# Altium PCB HLK_RM60_KIT_V1.1.PcbDoc (part 1 of 2)
Units mm, origin at the board's own origin, x right, y up, seen from the top; angles counter-clockwise.
Board outline 140 x 100 mm, 2 copper layers (Top, Bottom), stack 0.29 mm thick; 133 components, 198 nets, 607 pads, 989 vias.
Unrouted connection lines stored in the file: 4.
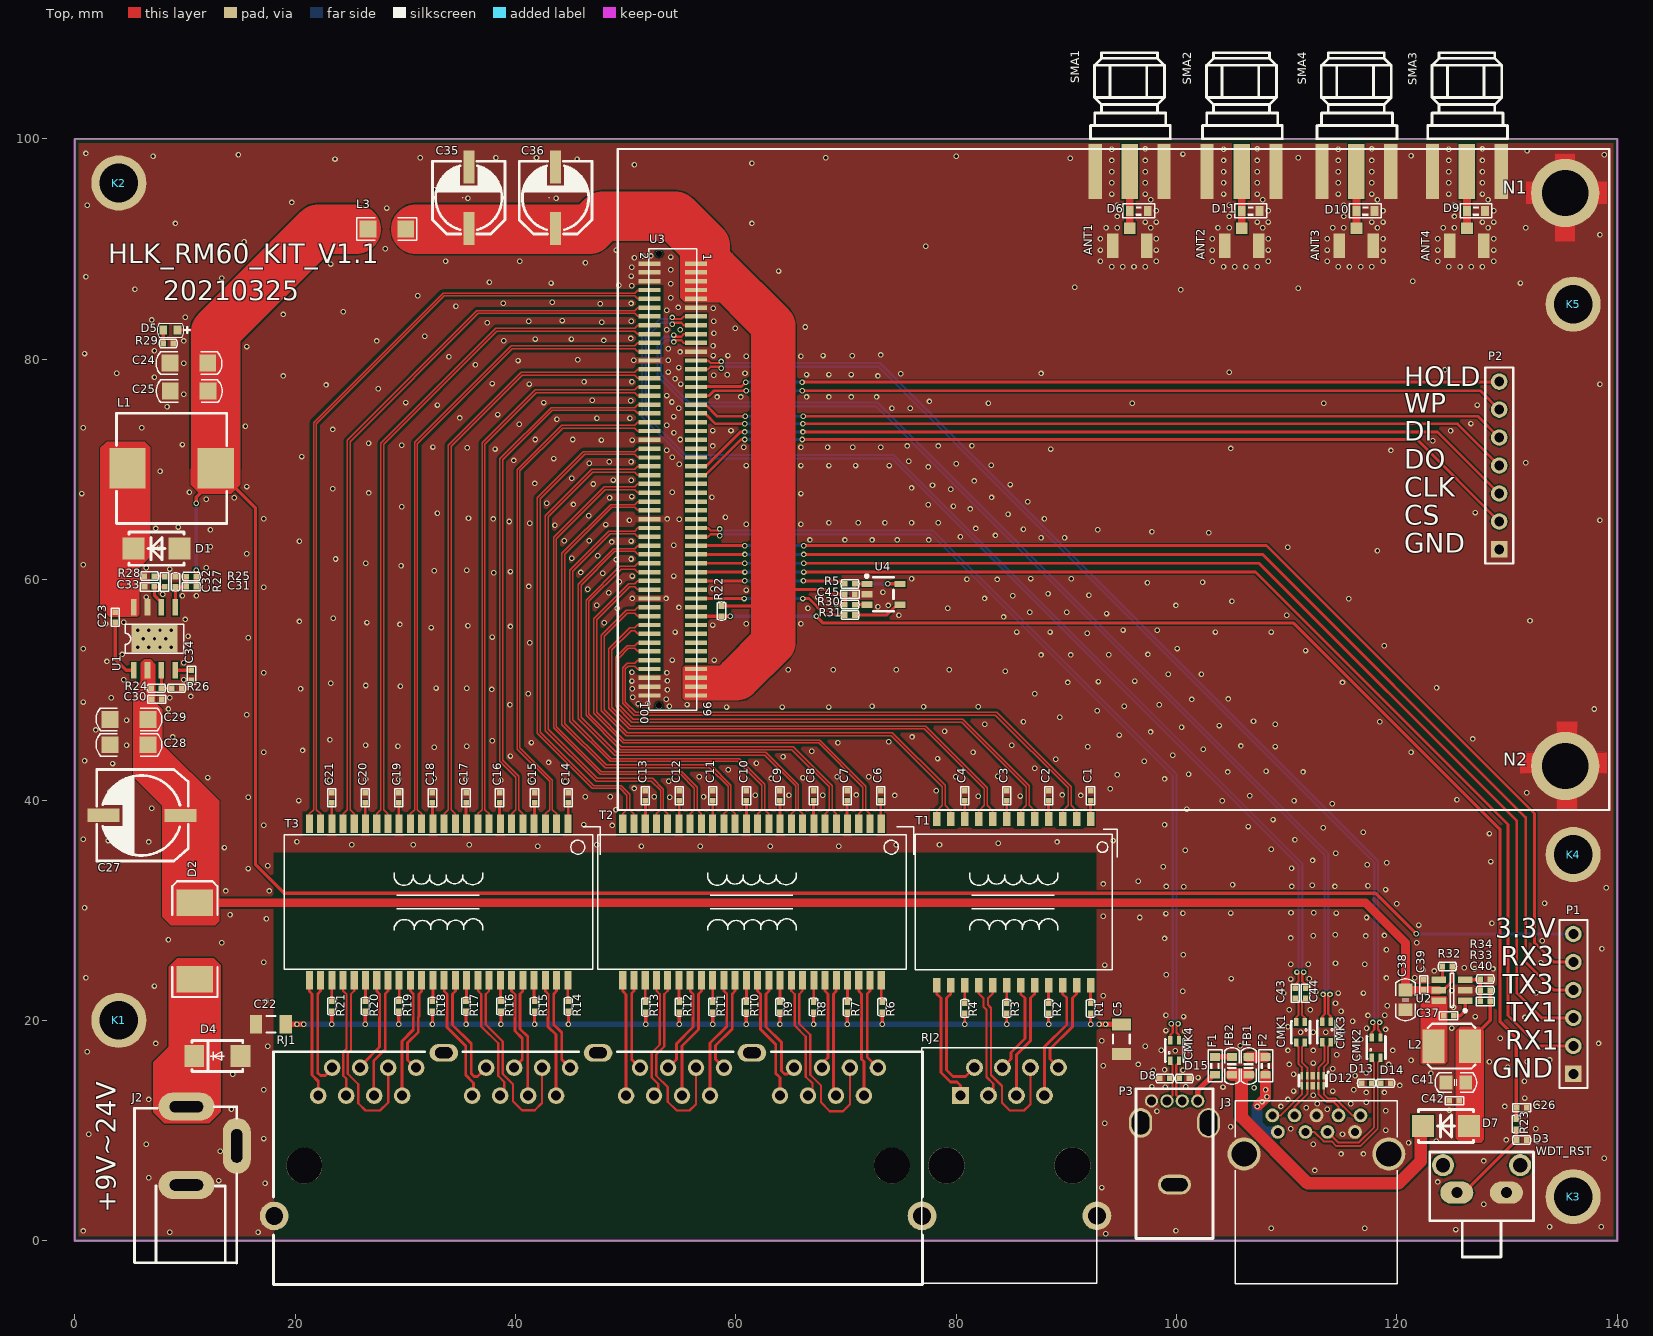
[diagram p0: Top view]
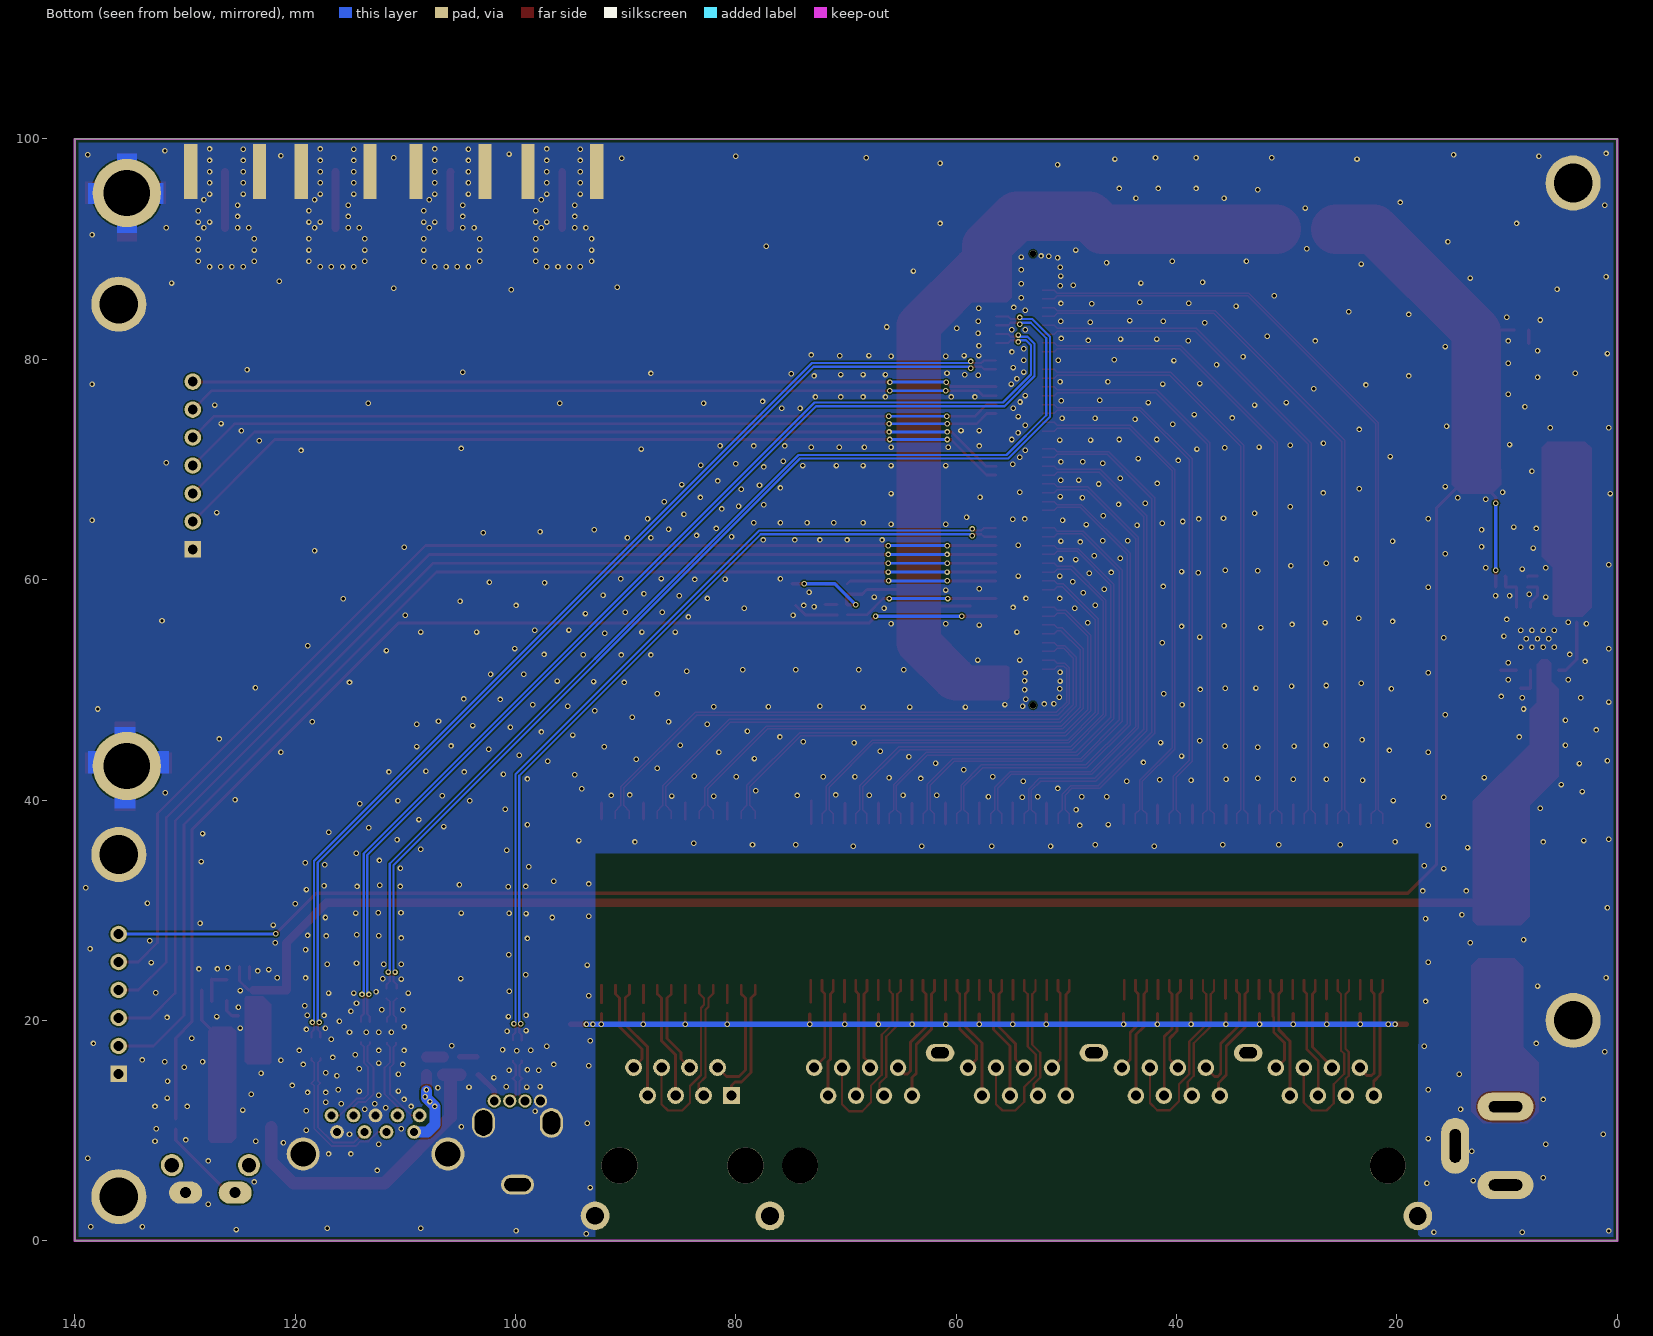
[diagram p1: Bottom view, seen from below]

## Layer stack, top to bottom
Solder Mask Top: solder mask 0.0102, Solder Resist, Dk 3.5
Top: signal copper 0.0178
Dielectric1: core 0.254, FR-4, Dk 4.2
Bottom: signal copper 0.0178
Solder Mask Bottom: solder mask 0.0102, Solder Resist, Dk 3.5

## Board outline
0,0 140,0 140,100 0,100

## Design rules (kind name [scope] priority, off if disabled: settings)
Clearance Clearance_1 [OnLayer('Keep-Out Layer') vs InNet('GND')] p1: gap=0.254
Clearance 100om [InNetClass('100om')] p2: gap=0.254
Clearance 90om [(InDifferentialPairClass('All Differential Pairs'))] p3 off: gap=0.127
Clearance [InNetClass('100om')] p4: gap=0.127
Clearance RF_50om [InNetClass('50om') vs InNet('GND')] p5: gap=0.15
Clearance "Clearance - Net - GND - 90OHM" [InNetClass('Undefined') vs InNetClass('90OHM')] p6 off: gap=0.254
Clearance "Clearance - Net - GND - 100OHM_2" [InNet('GND') And OnLayer('Top') vs InNetClass('100OHM') And OnLayer('Top')] p7 off: gap=0.254
Clearance "Clearance - Net - GND - 100OHM" [InNet('GND') And OnLayer('Inner Layer 2') vs InNetClass('100OHM') And OnLayer('Inner Layer 2')] p8 off: gap=0.254
Clearance "Clearance - Net - GND - DDRCLK" [InNet('GND') vs InNetClass('DDRCLK')] p9 off: gap=0.127
Clearance "Clearance - Net - GND - 50OHM_A" [InNet('GND') vs InNetClass('50OHM_A')] p10 off: gap=0.254
Clearance "Clearance - Net - GND - 85OHM" [InNet('GND') vs InNetClass('85OHM')] p11 off: gap=0.254
Clearance "Clearance - Net - GND - DDR" [InNet('GND') vs InNetClass('DDR')] p12 off: gap=0.127
Clearance "Clearance - Net - GND - 50OHM_G" [InNet('GND') vs InNetClass('50OHM_G')] p13 off: gap=0.254
Clearance "Clearance - Net - GND - 100OHM_1" [InNet('GND') And OnLayer('Bottom') vs InNetClass('100OHM') And OnLayer('Bottom')] p14 off: gap=0.254
Clearance "Clearance - NetClass - 90OHM" [InNetClass('90OHM')] p15 off: gap=0.1
Clearance "Clearance - NetClass - 85OHM_1" [InNetClass('85OHM') And OnLayer('Inner Layer 2')] p16 off: gap=0.1
Clearance "Clearance - NetClass - 100OHM" [InNetClass('100OHM') And OnLayer('Top') OR InNetClass('100OHM') And OnLayer('Bottom')] p17 off: gap=0.1
Clearance "Clearance - NetClass - DDRCLK" [InNetClass('DDRCLK')] p18 off: gap=0.1
Clearance "Clearance - NetClass - DDR" [InNetClass('DDR')] p19 off: gap=0.1
Clearance "Clearance - NetClass - 50OHM_G" [InNetClass('50OHM_G') OR InNetClass('50OHM_A')] p20 off: gap=0.1
Clearance "Clearance - NetClass - 85OHM" [InNetClass('85OHM') And OnLayer('Top')] p21 off: gap=0.1
Clearance "Clearance - NetClass - 90OHM- SMD" [InNetClass('90OHM') AND IsVia vs IsSMTPin] p22 off: gap=0.05
Clearance "Clearance - NetClass - 100OHM_1" [InNetClass('100OHM') And OnLayer('Inner Layer 2')] p23 off: gap=0.1
Clearance "Clearance - Default - DEFAULT - Via" [IsVia vs IsVia] p24: gap=0.089
Clearance "Clearance - Default - DEFAULT - Net" [All] p25: gap=0.127
ComponentClearance "ComponentClearance - Default - DEFAULT" [All] p1: gap=0 collisioncheckmode=3 verticalgap=0.254 showdistances=FALSE
DiffPairsRouting [All] p1: maxlimit=0.127 minlimit=0.127 mostfreqgap=0.127 toplayer_minwidth=0.203 toplayer_maxwidth=0.203 toplayer_prefwidth=0.203 bottomlayer_minwidth=0.203 bottomlayer_maxwidth=0.203 bottomlayer_prefwidth=0.203 maxuncoupledlength=12.7
FabricationTestpoint [(IsPad And (OnTopLayer Or OnBottomLayer))] p1: side=3 testpointundercomponent=TRUE minsize=1.016 maxsize=2.54 preferedsize=1.524 minholesize=0 maxholesize=1.016 preferedholesize=0.813 testpointgrid=0.025 allowsidetop=TRUE allowsidebottom=TRUE usegrid=TRUE gridtolerance=0
FanoutControl Fanout_SOIC [IsSOIC] p1: bgadir=Out bgaviamode=Centered fanoutstyle=Auto fanoutdirection=Alternating viagrid=0.025 // Fanout_SOIC (Default Rule)
FanoutControl Fanout_Small [(CompPinCount < 5)] p2: bgadir=Out bgaviamode=Centered fanoutstyle=Auto fanoutdirection=OutThenIn viagrid=0.025 // Fanout_Small (Default Rule)
FanoutControl Fanout_LCC [IsLCC] p3: bgadir=Out bgaviamode=Centered fanoutstyle=Auto fanoutdirection=Alternating viagrid=0.025 // Fanout_LCC (Default Rule)
FanoutControl Fanout_BGA [IsBGA] p4: bgadir=Out bgaviamode=Centered fanoutstyle=Auto fanoutdirection=Alternating viagrid=0.025 // Fanout_BGA (Default Rule)
HoleSize [All] p1: absolutevalues=TRUE maxlimit=4.2 minlimit=0.025 maxpercent=80.000 minpercent=20.000
Length "Default Length" [All] p1: maxlimit=2539.975 minlimit=0
MaxMinImpedance "Default Impedance" [All] p1: minimum=50.00 maximum=150.0
ParallelSegment "Default Parallel Segment Adjasent" [All] p1: limit=25.4 gap=5.08
ParallelSegment "Default Parallel Segment Same Layer" [All] p2: limit=25.4 gap=5.08
PlaneConnect "Default PlaneConnect" [All] p1: planeconnectstyle=Relief reliefexpansion=0.508 reliefentries=4 reliefconductorwidth=0.5 reliefairgap=0.254
PolygonConnect PolygonConnect_2 [All vs IsVia] p1: connectstyle=Direct reliefconductorwidth=0.254 reliefentries=4 polygonreliefangle="90 Angle" airgapwidth=0.254
PolygonConnect PolygonConnect_1 [InNet('GND') vs IsPad] p2: connectstyle=Direct reliefconductorwidth=0.254 reliefentries=4 polygonreliefangle="90 Angle" airgapwidth=0.254
PolygonConnect [All] p3: connectstyle=Relief reliefconductorwidth=0.5 reliefentries=4 polygonreliefangle="45 Angle" airgapwidth=0.254
RoutingLayers "RoutingLayers - Default - DEFAULT" [All] p1: top layer_v5=TRUE bottom layer_v5=TRUE
RoutingPriority "RoutingPriority - Default - DEFAULT" [All] p1: routingpriority=3
RoutingTopology "Default Routing Topology" [All] p1: topology=Shortest
RoutingVias "RoutingVias - Default - DEFAULT" [All] p1: holewidth=0.2 width=0.4 viastyle="Through Hole" minholewidth=0.2 minwidth=0.4 maxholewidth=0.3 maxwidth=0.5
SolderMaskExpansion "SolderMaskExpansion from CAM settings" [All] p1: expansion=0.051
Width "Width - Net - GND - 50OHM_A" [InNet('GND')] p1: maxlimit=10 minlimit=0.1 preferedwidth=0.2
Width "Width - Net - GND - 50OHM_G" [InNet('GND')] p2: maxlimit=0 minlimit=2539.975 preferedwidth=0 toplayer_minwidth=0 bottomlayer_minwidth=0 minimp=50.000000 maximp=50.000000 favimp=50.000000
Width "Width - Net - GND - DDRCLK" [InNet('GND')] p3: maxlimit=0 minlimit=2539.975 preferedwidth=0 toplayer_minwidth=0 bottomlayer_minwidth=0 minimp=50.000000 maximp=50.000000 favimp=50.000000
Width "Width - Net - GND - 100OHM_1" [InNet('GND') And OnLayer('Inner Layer 2')] p4: maxlimit=0 minlimit=2539.975 preferedwidth=0 toplayer_minwidth=0 bottomlayer_minwidth=0 minimp=50.000000 maximp=50.000000 favimp=50.000000
Width "Width - Net - GND - 100OHM" [InNet('GND') And OnLayer('Bottom')] p5: maxlimit=0 minlimit=2539.975 preferedwidth=0 toplayer_minwidth=0 bottomlayer_minwidth=0 minimp=50.000000 maximp=50.000000 favimp=50.000000
Width "Width - Net - GND - DDR" [InNet('GND')] p6: maxlimit=0 minlimit=2539.975 preferedwidth=0 toplayer_minwidth=0 bottomlayer_minwidth=0 minimp=50.000000 maximp=50.000000 favimp=50.000000
Width "Width - Net - GND - 100OHM_2" [InNet('GND') And OnLayer('Top')] p7: maxlimit=0 minlimit=2539.975 preferedwidth=0 toplayer_minwidth=0 bottomlayer_minwidth=0 minimp=50.000000 maximp=50.000000 favimp=50.000000
Width "Width - Net - GND - 90OHM" [InNet('GND')] p8: maxlimit=0 minlimit=2539.975 preferedwidth=0 toplayer_minwidth=0 bottomlayer_minwidth=0 minimp=50.000000 maximp=50.000000 favimp=50.000000
Width "Width - Net - GND - 85OHM" [InNet('GND')] p9: maxlimit=0 minlimit=2539.975 preferedwidth=0 toplayer_minwidth=0 bottomlayer_minwidth=0 minimp=50.000000 maximp=50.000000 favimp=50.000000
Width "Width - NetClass - 85OHM" [InNetClass('85OHM') And OnLayer('Inner Layer 2')] p10: maxlimit=5.08 minlimit=0.075 preferedwidth=0.152
Width "Width - NetClass - 90OHM" [InNetClass('90OHM')] p11: maxlimit=5.08 minlimit=0.075 preferedwidth=0.178
Width "Width - NetClass - 85OHM_1" [InNetClass('85OHM') And OnLayer('Top')] p12: maxlimit=5.08 minlimit=0.075 preferedwidth=0.191
Width "Width - NetClass - 50OHM_G" [InNetClass('50OHM_G') OR InNetClass('50OHM_A')] p13: maxlimit=5.08 minlimit=0.074 preferedwidth=0.191
Width "Width - NetClass - 100OHM" [InNetClass('100OHM') And OnLayer('Inner Layer 2')] p14: maxlimit=5.08 minlimit=0.075 preferedwidth=0.114
Width "Width - NetClass - 100OHM_1" [InNetClass('100OHM') And OnLayer('Top') OR InNetClass('100OHM') And OnLayer('Bottom') OR InNetClass('DDRCLK') OR InNetClass('DDR')] p15: maxlimit=5.08 minlimit=0.075 preferedwidth=0.127
Width "Default Width" [All] p16: maxlimit=5.08 minlimit=0.075 preferedwidth=0.1
18 further rules are at their usual default settings.

## Classes and differential pairs
net class 50om: NetANT1_1 NetANT2_1
net class 100om: ESW_TXVN_A_P0 ESW_TXVN_A_P1 ESW_TXVN_A_P2 ESW_TXVN_A_P3 ESW_TXVN_A_P4 ESW_TXVN_B_P0 ESW_TXVN_B_P1 ESW_TXVN_B_P2 ESW_TXVN_B_P3 ESW_TXVN_B_P4 ESW_TXVN_C_P0 ESW_TXVN_C_P1 ESW_TXVN_C_P2 ESW_TXVN_C_P3 ESW_TXVN_C_P4 ESW_TXVN_D_P0 ESW_TXVN_D_P1 ESW_TXVN_D_P2 ESW_TXVN_D_P3 ESW_TXVN_D_P4 ESW_TXVP_A_P0 ESW_TXVP_A_P1 ESW_TXVP_A_P2 ESW_TXVP_A_P3 ESW_TXVP_A_P4 ESW_TXVP_B_P0 ESW_TXVP_B_P1 ESW_TXVP_B_P2 ESW_TXVP_B_P3 ESW_TXVP_B_P4 ESW_TXVP_C_P0 ESW_TXVP_C_P1 ESW_TXVP_C_P2 ESW_TXVP_C_P3 ESW_TXVP_C_P4 ESW_TXVP_D_P0 ESW_TXVP_D_P1 ESW_TXVP_D_P2 ESW_TXVP_D_P3 ESW_TXVP_D_P4
component class HLK_RM60_KIT_V1.1: ANT1 ANT2 ANT3 ANT4 C23 C24 C25 C26 C27 C28 C29 C30 C31 C32 C33 C34 C35 C36 C37 C38 C39 C40 C41 C42 C43 C44 C45 CMK1 CMK2 CMK3 CMK4 D1 D2 D3 D4 D5 D6 D7 D8 D9 D10 D11 D12 D13 D14 D15 F1 F2 FB1 FB2 J2 J3 K1 K2 K3 K4 K5 L1 L2 L3 P1 P2 P3 R5 R22 R23 R24 R25 R26 R27 R28 R29 R30 R31 R32 R33 R34 SMA1 SMA2 SMA3 SMA4 U1 U2 U3 U4 WDT_RST
component class HLK_RM60_KIT_RJ45_V1.1: C1 C2 C3 C4 C5 C6 C7 C8 C9 C10 C11 C12 C13 C14 C15 C16 C17 C18 C19 C20 C21 C22 R1 R2 R3 R4 R6 R7 R8 R9 R10 R11 R12 R13 R14 R15 R16 R17 R18 R19 R20 R21 RJ1 RJ2 T1 T2 T3
component class "Room Definition 2": D7
component class "Room Definition 3": ANT1 D6
component class "Room Definition 4": D11 SMA2
component class "Room Definition 5": ANT3 D10 SMA2
component class "Room Definition 6": ANT2 D9 SMA3
differential pair USB_0: +USB_0_P -USB_0_N
differential pair USB: +USB_0_P -USB_0_N
differential pair SSUSB_TX: +SSUSB_TX_P -SSUSB_TX_N
differential pair SSUSB_RX: +SSUSB_RX_P -SSUSB_RX_N
differential pair USB_1: +USB_1_P -USB_1_N

## Components (designator, comment, footprint, x,y, rotation, side; value= is the part's Value field where it differs from the comment)
ANT1 "u.fl" U.FL-R-SMT-1 95.758,90.272 r180 top locked
ANT2 "u.fl" U.FL-R-SMT-1 105.918,90.272 r180 top locked
ANT3 "u.fl" U.FL-R-SMT-1 116.332,90.272 r180 top locked
ANT4 "u.fl" U.FL-R-SMT-1 126.365,90.272 r180 top locked
C1 "0.1uF" C0402 92.202,40.386 r270 top
C2 "0.1uF" C0402 88.392,40.386 r270 top
C3 "0.1uF" C0402 84.582,40.386 r270 top
C4 "0.1uF" C0402 80.772,40.386 r270 top
C5 "1000pF,2KV,SMD,1206" C1206 94.996,18.288 r270 top
C6 "0.1uF" C0402 73.152,40.386 r270 top
C7 "0.1uF" C0402 70.104,40.386 r270 top
C8 "0.1uF" C0402 67.056,40.386 r270 top
C9 "0.1uF" C0402 64.008,40.386 r270 top
C10 "0.1uF" C0402 60.96,40.386 r270 top
C11 "0.1uF" C0402 57.912,40.386 r270 top
C12 "0.1uF" C0402 54.864,40.386 r270 top
C13 "0.1uF" C0402 51.791,40.386 r270 top
C14 "0.1uF" C0402 44.783,40.193 r270 top
C15 "0.1uF" C0402 41.735,40.193 r270 top
C16 "0.1uF" C0402 38.56,40.193 r270 top
C17 "0.1uF" C0402 35.512,40.193 r270 top
C18 "0.1uF" C0402 32.464,40.193 r270 top
C19 "0.1uF" C0402 29.416,40.193 r270 top
C20 "0.1uF" C0402 26.368,40.193 r270 top
C21 "0.1uF" C0402 23.32,40.193 r270 top
C22 "1000pF,2KV,SMD,1206" C1206 17.805,19.66 r180 top
C23 "0.1uF" C0402 3.683,56.591 r270 top
C24 "47uF" CAP_1206 10.363,79.654 r0 top
C25 "47uF" CAP_1206 10.389,77.114 r0 top
C26 "0.1uF" C0402 131.318,12.065 r180 top
C27 "Cap Pol1" SMD,8x10mm 6.096,38.608 r180 top
C28 "4.7uF 50V" CAP_1206 4.928,45.009 r180 top
C29 "4.7uF 50V" CAP_1206 4.928,47.32 r180 top
C30 "0.01uF" C0402 7.442,49.149 r180 top
C31 "22pF" C0402 10.566,59.36 r0 top
C32 "2.2nF" C0402 8.153,59.792 r270 top
C33 "22pF" C0402 6.782,59.334 r0 top
C34 "0.01uF" C0402 10.592,51.333 r90 top
C35 "Cap Pol1" SMD,6.3x7.7mm 35.763,94.666 r90 top
C36 "Cap Pol1" SMD,6.3x7.7mm 43.637,94.666 r90 top
C37 "100nF" C0402 124.689,20.422 r180 top
C38 "10uF" CAP_0805 120.777,21.869 r90 top
C39 "100nF" C0402 122.428,23.241 r90 top
C40 "22pF" C0402 128.016,21.717 r0 top
C41 "47uF" CAP_0805 125.349,14.351 r0 top
C42 "100nF" C0402 125.222,12.7 r180 top
C43 "0.1uF" C0402 110.769,22.454 r90 top
C44 "0.1uF" C0402 111.709,22.454 r90 top
C45 "0.1uF" C0402 70.358,58.674 r180 top
CMK1 "ACM2012E-2P" SMD_4P 111.252,18.923 r270 top
CMK2 "ACM2012E-2P" SMD_4P 118.11,17.526 r90 top
CMK3 "ACM2012E-2P" SMD_4P 113.614,18.948 r270 top
CMK4 "ACM2012E-2P" SMD_4P 99.822,17.272 r90 top
D1 "SS54" LC-SMA(DO-214AC)_S2 7.417,62.814 r0 top
D2 "SS54" SMC 10.897,27.203 r90 top
D3 "BPESD0402-05ST" R0402 131.318,9.144 r180 top
D4 "SMAJ26CA" DO-214AC 12.954,16.764 r0 top
D5 "RED" LED-0603 8.687,82.652 r180 top
D6 "BPESD0402-05ST" RES_0603 96.571,93.472 r180 top
D7 "SS24" LC-SMA(DO-214AC)_S2 124.46,10.414 r0 top
D8 "BPESD0402-05ST" R0402 98.933,14.732 r0 top
D9 "BPESD0402-05ST" RES_0603 127.178,93.472 r180 top
D10 "BPESD0402-05ST" RES_0603 117.145,93.472 r180 top
D11 "BPESD0402-05ST" RES_0603 106.731,93.472 r180 top
D12 "B0524P" DFN-10 112.37,14.529 r180 top
D13 "BPESD0402-05ST" R0402 117.246,14.3 r0 top
D14 "BPESD0402-05ST" R0402 118.974,14.3 r180 top
D15 "BPESD0402-05ST" R0402 100.711,14.732 r180 top
F1 "0.5A" RES_0603 103.505,15.875 r90 top
F2 "1A" RES_0603 108.077,15.875 r90 top
FB1 "CBM160808U101T" CAP_0603 106.553,15.875 r90 top
FB2 "600R@100MHz" CAP_0603 105.029,15.875 r90 top
J2 "DC-044B" DC5.5 12.421,8.61 r90 top
J3 "USB3.0" USB3.0-9P-DIP 112.7,9.627 r0 top
K1 "安装孔" Z_LSK3.5#1 4,15 r0 top
K2 "安装孔" Z_LSK3.5#2 3.985,95.951 r0 top
K3 "安装孔" Z_LSK3.5#3 136.652,4.064 r0 top
K4 "安装孔" Z_LSK3.5#4 136,35.052 r0 top
K5 "安装孔" Z_LSK3.5#4 136,85 r0 top
L1 "4.7uH" L10.8x10x4mm 8.788,70.104 r0 top
L2 "10uH" L4*4 124.968,17.653 r0 top
L3 "600R@100MHz" R1206 30.048,91.821 r180 top
P1 "预留接口" HDR1X6 136.017,15.138 r90 top
P2 "预留烧录接口" HDR1X7 129.286,62.738 r90 top
P3 "USBA座" USBA座侧插 99.822,8.89 r0 top
R1 "75R" R0402 92.202,21.082 r90 top
R2 "75R" R0402 88.392,21.082 r90 top
R3 "75R" R0402 84.582,21.082 r90 top
R4 "75R" R0402 80.772,21.082 r90 top
R5 "0R" R0402 70.36,59.614 r180 top
R6 "75R" R0402 73.279,21.209 r90 top
R7 "75R" R0402 70.104,21.209 r90 top
R8 "75R" R0402 67.056,21.209 r90 top
R9 "75R" R0402 64.008,21.209 r90 top
R10 "75R" R0402 60.96,21.209 r90 top
R11 "75R" R0402 57.912,21.209 r90 top
R12 "75R" R0402 54.864,21.209 r90 top
R13 "75R" R0402 51.816,21.209 r90 top
R14 "75R" R0402 44.783,21.27 r90 top
R15 "75R" R0402 41.735,21.27 r90 top
R16 "75R" R0402 38.687,21.27 r90 top
R17 "75R" R0402 35.512,21.27 r90 top
R18 "75R" R0402 32.464,21.27 r90 top
R19 "75R" R0402 29.416,21.27 r90 top
R20 "75R" R0402 26.368,21.27 r90 top
R21 "75R" R0402 23.32,21.27 r90 top
R22 "10K" R0402 58.699,57.15 r270 top
R23 "1K" R0402 130.835,10.592 r90 top
R24 "665K" R0402 7.417,50.14 r180 top
R25 "10K 1%" R0402 10.566,60.274 r0 top
R26 "130K" R0402 9.246,50.14 r180 top
R27 "3.16K" R0402 9.144,59.792 r270 top
R28 "37.4K" R0402 6.782,60.325 r0 top
R29 "1K" R0402 8.484,81.432 r0 top
R30 "10K" R0402 70.36,57.734 r180 top
R31 "0R" R0402 70.36,56.794 r0 top
R32 "47K" R0402 124.587,24.892 r0 top
R33 "75K 1%" R0402 128.016,22.733 r0 top
R34 "10K 1%" R0402 128.016,23.749 r180 top
RJ1 "RJ45_不带灯X4" RJ45_网口不带灯X4 47.498,9.652 r0 top locked
RJ2 "RJ45X1" RJ45_网口不带灯X1 84.836,8.992 r0 top locked (schematic designator P1)
SMA1 "u.fl" RF_SMA_夹板1.6mm 95.742,97.028 r90 top
SMA2 "u.fl" RF_SMA_夹板1.6mm 105.902,97.028 r90 top
SMA3 "u.fl" RF_SMA_夹板1.6mm 126.349,97.028 r90 top
SMA4 "u.fl" RF_SMA_夹板1.6mm 116.316,97.028 r90 top
T1 "HN2409CG" TRANSFORMER/24P/SMD/HN2429CG 85.217,30.734 r180 top
T2 "HN4824CG" TRANSFORMER/48P/SMD/GS5014LF 61.468,30.734 r180 top
T3 "HN4824CG" TRANSFORMER/48P/SMD/GS5014LF 33.02,30.734 r180 top
U1 "TPS54531" SOP8-MP1484 7.239,54.635 r90 top
U2 "SY8201" SOT26 124.996,22.738 r180 top
U3 "HLK_WIFI6_Module" HLK_WIFI6_Module_SOCKET 93.726,69.088 r0 top locked
U4 "TPS3823" SOT23-5 73.406,58.674 r180 top
WDT_RST "SW-PB" 6x6x9.85侧按 127.686,5.613 r180 top (schematic designator WDT_RST1)

## Footprints (in the part's own frame and the unit in brackets; to place one, negate y for a bottom-side part, rotate by r counter-clockwise, add the part's x,y. Pads: shape width x height; smd on the part's side, far side on the other; paste and mask are expansions set on the pad)
6x6x9.85侧按 [mm]
  round 2 hole 1.3: 0(-3.5,-1.25) 0(3.5,-1.25)
  oval 3x2 hole 1: 1(-2.25,1.25) 2(2.25,1.25)
  silkscreen extent -4.7,-2.45 4.7,7.1
C0402 [mm]
  rect 0.5x0.5 smd: 1(-0.45,0) 2(0.45,0)
  silkscreen extent -0.82,-0.38 0.83,0.38
C1206 [mm] "Chip Capacitor, Body 3.2x1.6mm, IPC High Density"
  rect 1.1x1.7 smd: 1(-1.35,0) 2(1.35,0)
  silkscreen extent -0.4,-0.75 0.4,0.75, body extent -1.7,-0.9 1.7,0.9, height 1.3
CAP_0603 [mil]
  rect 28x36 smd: 1(-32,0) 2(32,0)
  silkscreen extent -66,-26 65,26, body extent -31,-16 31,16, height 36
CAP_0805 [mil]
  rect 45x50 smd: 1(-35,0) 2(35,0)
  silkscreen extent -74,-35 74,35
CAP_1206 [mil]
  rect 60x60 smd: 1(-67.5,0) 2(67.5,0)
  silkscreen extent -117,-40 118,40, body extent -63,-30 63,32, height 37
DC5.5 [mil]
  oval 100x200 hole 40 slot 120 at 90 deg: 1(140,90) 2(-140,90)
  oval 200x100 hole 40 slot 120 at 0 deg: 3(0,-90)
  silkscreen extent -418,-90 140,275
DFN-10 [mm]
  rect 0.2x0.7 smd: 1(-1,-0.45) 2(-0.5,-0.45) 4(0.5,-0.45) 5(1,-0.45) 6(1,0.45) 7(0.5,0.45) 9(-0.5,0.45) 10(-1,0.45)
  rect 0.4x0.7 smd: 3(0,-0.45) 8(0,0.45)
  silkscreen extent -1.44,-0.79 1.25,0.51
DO-214AC [mm]
  rect 1.8x2 smd: 1(2.1,0) 2(-2.1,0)
  silkscreen extent -2.3,-1.4 2.3,1.4
HDR1X6 [mm] "Connector; Header; 6 Position"
  rect 1.5x1.5 hole 0.9: 1(0,0)
  round 1.5 hole 0.9: 2(2.54,0) 3(5.08,0) 4(7.62,0) 5(10.16,0) 6(12.7,0)
  silkscreen extent -1.27,-1.27 13.97,1.27
HDR1X7 [mm] "Connector; Header; 7 Position"
  rect 1.5x1.5 hole 0.9: 1(0,0)
  round 1.5 hole 0.9: 2(2.54,0) 3(5.08,0) 4(7.62,0) 5(10.16,0) 6(12.7,0) 7(15.24,0)
  silkscreen extent -1.27,-1.27 16.51,1.27
HLK_WIFI6_Module_SOCKET [mm] "模块底板母座"
  round 0.6 hole 0.6 unplated: 0(-40.7,-20.5) 0(-40.7,20.5)
  round 6.2 hole 4.2: 0(41.55,-26) 0(41.55,26)
  rect 2x0.4 smd: 1(-37.35,19.6) 2(-41.55,19.6) 3(-37.35,18.8) 4(-41.55,18.8) 5(-37.35,18) 6(-41.55,18) 7(-37.35,17.2) 8(-41.55,17.2) 9(-37.35,16.4) 10(-41.55,16.4) 11(-37.35,15.6) 12(-41.55,15.6) 13(-37.35,14.8) 14(-41.55,14.8) 15(-37.35,14) 16(-41.55,14) 17(-37.35,13.2) 18(-41.55,13.2) 19(-37.35,12.4) 20(-41.55,12.4) 21(-37.35,11.6) 22(-41.55,11.6) 23(-37.35,10.8) 24(-41.55,10.8) 25(-37.35,10) 26(-41.55,10) 27(-37.35,9.2) 28(-41.55,9.2) 29(-37.35,8.4) 30(-41.55,8.4) 31(-37.35,7.6) 32(-41.55,7.6) 33(-37.35,6.8) 34(-41.55,6.8) 35(-37.35,6) 36(-41.55,6) 37(-37.35,5.2) 38(-41.55,5.2) 39(-37.35,4.4) 40(-41.55,4.4) 41(-37.35,3.6) 42(-41.55,3.6) 43(-37.35,2.8) 44(-41.55,2.8) 45(-37.35,2) 46(-41.55,2) 47(-37.35,1.2) 48(-41.55,1.2) 49(-37.35,0.4) 50(-41.55,0.4) 51(-37.35,-0.4) 52(-41.55,-0.4) 53(-37.35,-1.2) 54(-41.55,-1.2) 55(-37.35,-2) 56(-41.55,-2) 57(-37.35,-2.8) 58(-41.55,-2.8) 59(-37.35,-3.6) 60(-41.55,-3.6) 61(-37.35,-4.4) 62(-41.55,-4.4) 63(-37.35,-5.2) 64(-41.55,-5.2) 65(-37.35,-6) 66(-41.55,-6) 67(-37.35,-6.8) 68(-41.55,-6.8) 69(-37.35,-7.6) 70(-41.55,-7.6) 71(-37.35,-8.4) 72(-41.55,-8.4) 73(-37.35,-9.2) 74(-41.55,-9.2) 75(-37.35,-10) 76(-41.55,-10) 77(-37.35,-10.8) 78(-41.55,-10.8) 79(-37.35,-11.6) 80(-41.55,-11.6) 81(-37.35,-12.4) 82(-41.55,-12.4) 83(-37.35,-13.2) 84(-41.55,-13.2) 85(-37.35,-14) 86(-41.55,-14) 87(-37.35,-14.8) 88(-41.55,-14.8) 89(-37.35,-15.6) 90(-41.55,-15.6) 91(-37.35,-16.4) 92(-41.55,-16.4) 93(-37.35,-17.2) 94(-41.55,-17.2) 95(-37.35,-18) 96(-41.55,-18) 97(-37.35,-18.8) 98(-41.55,-18.8) 99(-37.35,-19.6) 100(-41.55,-19.6)
  silkscreen extent -44.45,-30 45.55,30
L4*4 [mm]
  rect 2x3 smd: 1(-1.651,0) 2(1.651,0)
  silkscreen extent -2.16,-2.03 2.16,2.03, body extent -2,-2.03 2,1.97, height 1
L10.8x10x4mm [mm]
  rect 3.3x3.7 smd: 1(-4,0) 2(4,0)
  silkscreen extent -5,-5 5,5
LC-SMA(DO-214AC)_S2 [mm]
  rect 2x2 smd: 1(2.1,0) 2(-2.1,0)
  silkscreen extent -2.5,-1.5 2.5,1.5
LED-0603 [mil]
  rect 28x32 smd: 1(-25.59,0) 2(25.59,0)
  silkscreen extent -70,-25 48,25
R0402 [mil]
  rect 20x20 smd: 1(-18,0) 2(18,0)
  silkscreen extent -32,-15 32,15
R1206 [mil]
  rect 60x60 smd: 1(0,0) 2(135,0)
  silkscreen extent -39,-40 175,40, body extent 4,-32 130,31, height 24
RES_0603 [mil]
  rect 28x36 smd: 1(-32,0) 2(32,0)
  silkscreen extent -57,-25 57,25, body extent -31,-16 32,16, height 20
RF_SMA_夹板1.6mm [mm]
  rect 5x1.5 smd: 1(0,0)
  rect 5x1.2 smd: 2(0,3.125) 3(0,-3.125)
  rect 5x1.2 smd far side: 2(0,3.125) 3(0,-3.125)
  silkscreen extent 2.99,-3.68 10.79,3.56
RJ45_网口不带灯X1 [mm] "千兆网口"
  round 2.6 hole 1.6: 0(-7.94,-6.73) 0(7.94,-6.73)
  rect 1.524x1.524 hole 0.95: 1(-4.445,4.19)
  round 1.524 hole 0.95: 2(-3.175,6.73) 3(-1.905,4.19) 4(-0.635,6.73) 5(0.635,4.19) 6(1.905,6.73) 7(3.175,4.19) 8(4.445,6.73)
  round 3.3 hole 3.3 unplated: ""(-5.715,-2.16) ""(5.715,-2.16)
  silkscreen extent -7.94,-12.86 7.94,8.54
RJ45_网口不带灯X4 [mm] "千兆网口"
  round 1.5 hole 0.9: A1(-25.4,3.515) A2(-24.13,6.055) A3(-22.86,3.515) A4(-21.59,6.055) A5(-20.32,3.515) A6(-19.05,6.055) A7(-17.78,3.515) A8(-16.51,6.055) B1(-11.43,3.515) B2(-10.16,6.055) B3(-8.89,3.515) B4(-7.62,6.055) B5(-6.35,3.515) B6(-5.08,6.055) B7(-3.81,3.515) B8(-2.54,6.055) C1(2.54,3.515) C2(3.81,6.055) C3(5.08,3.515) C4(6.35,6.055) C5(7.62,3.515) C6(8.89,6.055) C7(10.16,3.515) C8(11.43,6.055) D1(16.51,3.515) D2(17.78,6.055) D3(19.05,3.515) D4(20.32,6.055) D5(21.59,3.515) D6(22.86,6.055) D7(24.13,3.515) D8(25.4,6.055)
  round 2.6 hole 1.6: EH(-29.405,-7.405) EH(29.405,-7.405)
  oval 2.6x1.6 hole 1 slot 1.6 at 0 deg: EH(-14,7.405) EH(0,7.405) EH(13.97,7.405)
  round 3.25 hole 3.25 unplated: ""(-26.67,-2.835) ""(26.67,-2.835)
  silkscreen extent -29.45,-13.64 29.45,7.51
SMC [mm] "DO-214-AB/SMC; 2 C-Bend Leads; Body 7.9 x 5.9 mm, inc. leads (LxW)"
  rect 2.4x3.3 smd: 1(-3.475,0) 2(3.475,0)
  silkscreen extent -5.07,-2.05 5.43,2.05
SMD,6.3x7.7mm [mm] "贴片型铝电解电容器 6.3x7.7mm"
  rect 3x1 smd: 1(-2.8,0) 2(2.8,0)
  silkscreen extent -3.3,-3.3 3.3,3.3
SMD,8x10mm [mm]
  rect 2.901x1.199 smd: 1(-3.5,0.005) 2(3.5,-0.005)
  silkscreen extent -4.21,-4.16 4.1,4.15
SMD_4P [mm] "共模电感"
  rect 0.75x0.4 smd: 1(-0.925,0.4) 2(-0.925,-0.4) 3(0.925,-0.4) 4(0.925,0.4)
  silkscreen extent -1,-0.85 1,0.85
SOP8-MP1484 [mm]
  rect 1.5x0.5 smd: 1(-2.857,1.905) 2(-2.857,0.635) 3(-2.857,-0.635) 4(-2.857,-1.905) 5(2.857,-1.905) 6(2.857,-0.635) 7(2.857,0.635) 8(2.857,1.905)
  round 0.5 hole 0.3 mask+0: 9(-0.762,1.524) 9(-0.762,-0.508) 9(-0.762,0.508) 9(-0.762,-1.524) 9(0,1.016) 9(0,0) 9(0,-1.016) 9(0.762,1.524) 9(0.762,-0.508) 9(0.762,0.508) 9(0.762,-1.524)
  rect 2.5x4.2 smd mask+0: 9(0,0)
  silkscreen extent -1.33,-2.67 1.33,2.67, body extent -2.94,-2.53 3.07,2.47, height 1.9
SOT23-5 [mm]
  rect 1x0.55 smd: 1(1.5,-0.95) 2(1.5,0) 3(1.5,0.95) 4(-1.5,0.95) 5(-1.5,-0.95)
  silkscreen extent -0.9,-1.78 1.65,1.55
SOT26 [mm]
  rect 1.3x0.6 smd: 1(-1.195,0.955) 2(-1.195,0.005) 3(-1.195,-0.945) 4(1.205,-0.945) 5(1.205,0.005) 6(1.205,0.955)
  silkscreen extent -1.32,-1.54 0.15,1.98, body extent -1.39,-1.42 1.41,1.48, height 1.2
TRANSFORMER/24P/SMD/HN2429CG [mm] "千兆隔离变压器，贴片"
  rect 0.66x1.3 smd: 1(-6.985,-7.55) 2(-5.715,-7.55) 3(-4.445,-7.55) 4(-3.175,-7.55) 5(-1.905,-7.55) 6(-0.635,-7.55) 7(0.635,-7.55) 8(1.905,-7.55) 9(3.175,-7.55) 10(4.445,-7.55) 11(5.715,-7.55) 12(6.985,-7.55) 13(6.985,7.55) 14(5.715,7.55) 15(4.445,7.55) 16(3.175,7.55) 17(1.905,7.55) 18(0.635,7.55) 19(-0.635,7.55) 20(-1.905,7.55) 21(-3.175,7.55) 22(-4.445,7.55) 23(-5.715,7.55) 24(-6.985,7.55)
  silkscreen extent -9.42,-6.62 8.95,6.15
TRANSFORMER/48P/SMD/GS5014LF [mm] "千兆隔离变压器，贴片"
  rect 0.64x1.7 smd: 1(-11.73,-7.1) 2(-10.71,-7.1) 3(-9.69,-7.1) 4(-8.67,-7.1) 5(-7.65,-7.1) 6(-6.63,-7.1) 7(-5.61,-7.1) 8(-4.59,-7.1) 9(-3.57,-7.1) 10(-2.55,-7.1) 11(-1.53,-7.1) 12(-0.51,-7.1) 13(0.51,-7.1) 14(1.53,-7.1) 15(2.55,-7.1) 16(3.57,-7.1) 17(4.59,-7.1) 18(5.61,-7.1) 19(6.63,-7.1) 20(7.65,-7.1) 21(8.67,-7.1) 22(9.69,-7.1) 23(10.71,-7.1) 24(11.73,-7.1) 25(11.73,7.1) 26(10.71,7.1) 27(9.69,7.1) 28(8.67,7.1) 29(7.65,7.1) 30(6.63,7.1) 31(5.61,7.1) 32(4.59,7.1) 33(3.57,7.1) 34(2.55,7.1) 35(1.53,7.1) 36(0.51,7.1) 37(-0.51,7.1) 38(-1.53,7.1) 39(-2.55,7.1) 40(-3.57,7.1) 41(-4.59,7.1) 42(-5.61,7.1) 43(-6.63,7.1) 44(-7.65,7.1) 45(-8.67,7.1) 46(-9.69,7.1) 47(-10.71,7.1) 48(-11.73,7.1)
  silkscreen extent -14.69,-6.83 14,6.1
U.FL-R-SMT-1 [mm]
  rect 1.05x1.05 smd: 1(0,-1.626)
  rect 1.05x2.2 smd: 2(-1.524,-0.025) 3(1.549,-0.025)
  body extent -1.5,-1.63 1.5,1.47, height 0.01
USB3.0-9P-DIP [mm]
  round 1.25 hole 0.75: 1(-3.5,0.25) 2(-1,0.25) 3(1,0.25) 4(3.5,0.25) 5(4,1.75) 6(2,1.75) 7(0,1.75) 8(-2,1.75) 9(-4,1.75)
  round 3 hole 2.3: 10(-6.57,-1.75) 11(6.57,-1.75)
  silkscreen extent -7.35,-13.53 7.35,3.07
USBA座侧插 [mm] "侧插"
  round 1.2 hole 0.8: 1(2.098,3.8) 2(0.699,3.8) 3(-0.698,3.8) 4(-2.098,3.8)
  oval 2.1x2.699 hole 1.6 slot 2.1 at 90 deg copper offset 0.001,-0.001: 5(-3.08,1.8)
  oval 2.1x2.699 hole 1.6 slot 2.3 at 90 deg copper offset -0.001,0.001: 6(3.08,1.8)
  oval 3x1.8 hole 1.2 slot 2.4 at 0 deg: 7(-0.01,-3.8)
  silkscreen extent -3.5,-8.7 3.5,4.9
Z_LSK3.5#1 [mm]
  round 5 hole 3.5: 0(0,5)
Z_LSK3.5#2 [mm]
  round 5 hole 3.5: 0(0.015,0.049)
Z_LSK3.5#3 [mm]
  round 5 hole 3.5: 0(-0.652,-0.064)
Z_LSK3.5#4 [mm]
  round 5 hole 3.5: 0(0,0)

## Part data
ANT1 ANT2 ANT3 ANT4 SMA1 SMA2 SMA3 SMA4: "SAM天线座"
C1 C2 C3 C4 C6 C7 C8 C9 C10 C11 C12 C13 C14 C15 C16 C17 C18 C19 C20 C21: library part 0.1UF/25V_+80%-20%_CC_S0603, "Cap, MLCC, 0402, Y5V, 16V"
C5 C22: library part "CAP NP_Dup1", "Cap, HighVolt, SMD 1206, 2KV"
C23 C24 C25 C26 C28 C29 C30 C31 C32 C33 C34 C43 C44 C45: library part CAP, "Capacitor"
C27 C35 C36: "Polarized Capacitor (Radial)"
C37 C38 C39 C40 C41 C42: library part Cap, "Capacitor"
CMK1 CMK2 CMK3 CMK4: library part CMK1
D1 D3 D6 D8 D9 D10 D11 D13 D14 D15: library part "Diode BAS70", "Silicon AF Schottky Diode for High-Speed Switching"
D2 D7: library part Diode, "Default Diode"
D4: library part TVS
D5: library part LED0, "贴片发光二极管"
F1 F2: library part "Fuse 1", "Fuse"
FB1: library part INDUCTOR
FB2 L3: library part L/0402
J2: "Low Voltage Power Supply Connector"
K1 K2 K3 K4 K5: library part Z_LSK
L1 L2: library part LineInductors
P1: library part "Header 6", "Header, 6-Pin"
P2: library part "Header 7", "Header, 7-Pin"
R1 R2 R3 R4: library part R75_1%_S0603, "Resistor, 0402, 5%"
R5 R22 R23 R30 R31: library part RES2
R6 R7 R8 R9 R10 R11 R12 R13 R14 R15 R16 R17 R18 R19 R20 R21: library part R75_1%_S0603, "Resistor, SMD 0402, 5%"
R24 R25 R26 R27 R28 R32 R33 R34: library part Res2, "Resistor"
R29: library part Res1, "Resistor"
RJ2: library part RJ45X1_4
T1: library part FT20-252B_2
T2 T3: library part "XMER 2P G2PM109N"
WDT_RST: "Switch"

## Via types
v1: diameter 0.5, hole 0.3, Top to Bottom, tented both sides, 989 vias

## Nets (pads, with @x,y where several pads share a name; then routed paths per layer and width w, separated by ;. In a path a pad name is that pad's centre, name@x,y a point inside that pad or via, vN(x,y) a via of type N, cw(c..) or ccw(c..) an arc to the next point about the centre after c; other vN are vias at no path point)
+3.3V: C24.2 C25.2 C31.2 D5.1 L1.2 L3.2 P1.6 R25.2 | length 203.5
  Top w0.3: D5.1@9.337,82.652 12.648,82.652 ; C31.2@11.016,59.36 11.016,60.274 v1(11.016,60.866) ; v1(11.016,66.922) 11.016,67.481 12.788,69.253 L1.2@12.788,70.104 16.408,66.484 16.408,34.138 18.999,31.547 118.059,31.547 v1(121.755,27.851) ; C31.2@11.042,59.36 C31.2@11.049,59.367
  Top w4.5: L1.2@12.788,70.104 12.788,77.114 12.788,79.654 12.788,82.511 22.098,91.821 25.527,91.821
  Bottom w0.3: v1(11.016,60.866) v1(11.016,66.922) ; v1@121.742,27.838 121.755,27.838 P1.6@136.017,27.838
+5V: C40.2 C41.2 C42.1 D7.1 L2.2 R33.2 | length 12.5
  Top w0.3: D7.1@126.619,10.473 126.619,14.351 L2.2@126.619,17.653 ; L2.2@126.619,18.161 128.473,20.015 128.473,21.717 R33.2@128.473,22.733
+9V~24V: D2.1 D4.2 J2.1
ESW_P0_LED: U3.91
ESW_P1_LED: U3.89
ESW_P2_LED: U3.87
ESW_P3_LED: U3.85
ESW_P4_LED: U3.83
ESW_TXVN_A_P0: T3.23 U3.10 | length 71.6
  Top w0.127: T3.23@22.31,37.834 22.31,38.747 21.927,39.13 21.927,74.149 33.539,85.761 50.839,85.761 51.113,85.488 U3.10@52.176,85.488
ESW_TXVN_A_P1: T3.11 U3.28 | length 55.2
  Top w0.127: T3.11@34.55,37.834 34.55,38.747 34.167,39.13 34.167,72.115 40.613,78.561 50.84,78.561 51.113,78.288 U3.28@52.176,78.288
ESW_TXVN_A_P2: T2.23 U3.46 | length 46.2
  Top w0.127: T2.23@50.758,37.834 50.758,38.747 50.375,39.13 50.375,40.535 49.61,41.3 47.095,41.3 42.24,46.155 42.24,67.332 46.269,71.361 50.839,71.361 51.113,71.088 U3.46@52.176,71.088
ESW_TXVN_A_P3: T2.11 U3.64 | length 45.6
  Top w0.127: U3.64@52.176,63.888 51.113,63.888 50.839,64.161 48.594,64.161 45.187,60.753 45.187,47.273 48.695,43.764 60.3,43.764 62.615,41.449 62.615,39.13 62.998,38.747 T2.11@62.998,37.834
ESW_TXVN_A_P4: T1.11 U3.82 | length 48.8
  Top w0.127: U3.82@52.176,56.688 51.113,56.688 50.84,56.961 50.154,56.961 48.057,54.864 48.057,48.213 50.169,46.101 74.219,46.101 78.994,41.326 78.994,39.505 79.502,38.997 T1.11@79.502,38.284
ESW_TXVN_B_P0: T3.20 U3.14 | length 67
  Top w0.127: T3.20@25.37,37.834 25.37,38.747 24.987,39.13 24.987,72.536 36.612,84.161 50.839,84.161 51.113,83.888 U3.14@52.176,83.888
ESW_TXVN_B_P1: T3.8 U3.32 | length 51.6
  Top w0.127: T3.8@37.61,37.834 37.61,38.747 37.227,39.13 37.227,72.304 41.884,76.961 50.84,76.961 51.113,76.688 U3.32@52.176,76.688
ESW_TXVN_B_P2: T2.20 U3.50 | length 46.3
  Top w0.127: U3.50@52.176,69.488 51.113,69.488 50.839,69.761 47.032,69.761 42.977,65.706 42.977,46.409 47.425,41.961 52.451,41.961 53.435,40.977 53.435,39.13 53.818,38.747 T2.20@53.818,37.834
ESW_TXVN_B_P3: T2.8 U3.68 | length 45.6
  Top w0.127: U3.68@52.176,62.288 51.113,62.288 50.839,62.561 49.026,62.561 45.949,59.483 45.949,47.502 49.127,44.323 62.738,44.323 65.675,41.386 65.675,39.13 66.058,38.747 T2.8@66.058,37.834
ESW_TXVN_B_P4: T1.8 U3.86 | length 49.6
  Top w0.127: U3.86@52.176,55.088 51.113,55.088 50.84,55.361 50.488,55.361 48.743,53.616 48.743,48.416 50.448,46.711 77.216,46.711 82.804,41.123 82.804,39.505 83.312,38.997 T1.8@83.312,38.284
ESW_TXVN_C_P0: T3.17 U3.18 | length 63.1
  Top w0.127: T3.17@28.43,37.834 28.43,38.747 28.047,39.13 28.047,72.294 38.314,82.561 50.839,82.561 51.113,82.288 U3.18@52.176,82.288
ESW_TXVN_C_P1: T3.5 U3.36 | length 49.1
  Top w0.127: T3.5@40.67,37.834 40.67,38.747 40.287,39.13 40.287,42.165 38.837,43.615 38.837,70.862 43.335,75.361 50.839,75.361 51.113,75.088 U3.36@52.176,75.088
ESW_TXVN_C_P2: T2.17 U3.54 | length 46
  Top w0.127: U3.54@52.176,67.888 51.113,67.888 50.84,68.161 48.149,68.161 43.713,63.725 43.713,46.663 47.806,42.57 55.093,42.57 56.495,41.168 56.495,39.13 56.878,38.747 T2.17@56.878,37.834
ESW_TXVN_C_P3: T2.5 U3.72 | length 45.5
  Top w0.127: U3.72@52.176,60.688 51.113,60.688 50.839,60.961 49.585,60.961 46.66,58.035 46.66,47.781 49.61,44.831 65.202,44.831 68.735,41.298 68.735,39.13 69.118,38.747 T2.5@69.118,37.834
ESW_TXVN_C_P4: T1.5 U3.90 | length 51.1
  Top w0.127: U3.90@52.176,53.488 51.113,53.488 50.839,53.761 50.256,53.761 49.352,52.857 49.352,48.645 50.677,47.32 80.594,47.32 86.614,41.3 86.614,39.505 87.122,38.997 T1.5@87.122,38.284
ESW_TXVN_D_P0: T3.14 U3.22 | length 59.4
  Top w0.127: T3.14@31.49,37.834 31.49,38.747 31.107,39.13 31.107,72.357 39.711,80.961 50.84,80.961 51.113,80.688 U3.22@52.176,80.688
ESW_TXVN_D_P1: T3.2 U3.40 | length 46.9
  Top w0.127: T3.2@43.73,37.834 43.73,38.747 43.347,39.13 43.347,41.797 40.411,44.733 40.411,69.872 44.301,73.761 50.839,73.761 51.113,73.488 U3.40@52.176,73.488
ESW_TXVN_D_P2: T2.14 U3.58 | length 46
  Top w0.127: U3.58@52.176,66.288 51.113,66.288 50.839,66.561 48.734,66.561 44.475,62.303 44.475,46.943 48.238,43.18 57.709,43.18 59.555,41.334 59.555,39.13 59.938,38.747 T2.14@59.938,37.834
ESW_TXVN_D_P3: T2.2 U3.76 | length 45.3
  Top w0.127: U3.76@52.176,59.088 51.113,59.088 50.84,59.361 50.368,59.361 47.371,56.364 47.371,47.959 49.889,45.441 67.615,45.441 71.795,41.26 71.795,39.13 72.178,38.747 T2.2@72.178,37.834
ESW_TXVN_D_P4: T1.2 U3.94 | length 52.2
  Top w0.127: U3.94@52.176,51.888 51.113,51.888 50.839,52.161 50.256,52.161 49.987,51.892 49.987,48.873 50.905,47.955 83.668,47.955 90.424,41.199 90.424,39.505 90.932,38.997 T1.2@90.932,38.284
ESW_TXVP_A_P0: T3.24 U3.8 | length 72.1
  Top w0.127: T3.24@21.29,37.834 21.29,38.747 21.673,39.131 21.673,74.255 33.433,86.015 50.84,86.015 51.113,86.288 U3.8@52.176,86.288
ESW_TXVP_A_P1: T3.12 U3.26 | length 55.7
  Top w0.127: T3.12@33.53,37.834 33.53,38.747 33.913,39.131 33.913,72.22 40.508,78.815 50.84,78.815 51.113,79.088 U3.26@52.176,79.088
ESW_TXVP_A_P2: T2.24 U3.44 | length 46.6
  Top w0.127: T2.24@49.738,37.834 49.738,38.747 50.121,39.131 50.121,40.43 49.505,41.046 46.99,41.046 41.986,46.05 41.986,67.437 46.164,71.615 50.84,71.615 51.113,71.888 U3.44@52.176,71.888
ESW_TXVP_A_P3: T2.12 U3.62 | length 46
  Top w0.127: U3.62@52.176,64.688 51.113,64.688 50.84,64.415 48.489,64.415 44.933,60.858 44.933,47.168 48.59,43.51 60.194,43.51 62.361,41.344 62.361,39.131 61.978,38.747 T2.12@61.978,37.834
ESW_TXVP_A_P4: T1.12 U3.80 | length 49.2
  Top w0.127: U3.80@52.176,57.488 51.113,57.488 50.84,57.215 50.049,57.215 47.803,54.969 47.803,48.108 50.063,45.847 74.114,45.847 78.74,41.221 78.74,39.505 78.232,38.997 T1.12@78.232,38.284
ESW_TXVP_B_P0: T3.21 U3.12 | length 67.4
  Top w0.127: T3.21@24.35,37.834 24.35,38.747 24.733,39.131 24.733,72.641 36.507,84.415 50.84,84.415 51.113,84.688 U3.12@52.176,84.688
ESW_TXVP_B_P1: T3.9 U3.30 | length 52
  Top w0.127: T3.9@36.59,37.834 36.59,38.747 36.973,39.131 36.973,72.41 41.778,77.215 50.84,77.215 51.113,77.488 U3.30@52.176,77.488
ESW_TXVP_B_P2: T2.21 U3.48 | length 46.7
  Top w0.127: U3.48@52.176,70.288 51.113,70.288 50.84,70.015 46.926,70.015 42.723,65.811 42.723,46.304 47.32,41.707 52.346,41.707 53.181,40.872 53.181,39.131 52.798,38.747 T2.21@52.798,37.834
ESW_TXVP_B_P3: T2.9 U3.66 | length 46
  Top w0.127: U3.66@52.176,63.088 51.113,63.088 50.84,62.815 48.921,62.815 45.695,59.588 45.695,47.396 49.022,44.069 62.633,44.069 65.421,41.281 65.421,39.131 65.038,38.747 T2.9@65.038,37.834
ESW_TXVP_B_P4: T1.9 U3.84 | length 50
  Top w0.127: U3.84@52.176,55.888 51.113,55.888 50.84,55.615 50.383,55.615 48.489,53.721 48.489,48.311 50.343,46.457 77.111,46.457 82.55,41.017 82.55,39.505 82.042,38.997 T1.9@82.042,38.284
ESW_TXVP_C_P0: T3.18 U3.16 | length 63.5
  Top w0.127: T3.18@27.41,37.834 27.41,38.747 27.793,39.13 27.793,72.399 38.209,82.815 50.84,82.815 51.113,83.088 U3.16@52.176,83.088
ESW_TXVP_C_P1: T3.6 U3.34 | length 49.5
  Top w0.127: T3.6@39.65,37.834 39.65,38.747 40.033,39.131 40.033,42.06 38.583,43.51 38.583,70.968 43.23,75.615 50.84,75.615 51.113,75.888 U3.34@52.176,75.888
ESW_TXVP_C_P2: T2.18 U3.52 | length 46.4
  Top w0.127: U3.52@52.176,68.688 51.113,68.688 50.84,68.415 48.044,68.415 43.459,63.83 43.459,46.558 47.701,42.316 54.987,42.316 56.241,41.063 56.241,39.13 55.858,38.747 T2.18@55.858,37.834
ESW_TXVP_C_P3: T2.6 U3.70 | length 45.9
  Top w0.127: U3.70@52.176,61.488 51.113,61.488 50.84,61.215 49.48,61.215 46.406,58.141 46.406,47.676 49.505,44.577 65.097,44.577 68.481,41.193 68.481,39.131 68.098,38.747 T2.6@68.098,37.834
ESW_TXVP_C_P4: T1.6 U3.88 | length 51.5
  Top w0.127: U3.88@52.176,54.288 51.113,54.288 50.84,54.015 50.151,54.015 49.098,52.963 49.098,48.539 50.571,47.066 80.489,47.066 86.36,41.195 86.36,39.505 85.852,38.997 T1.6@85.852,38.284
ESW_TXVP_D_P0: T3.15 U3.20 | length 59.8
  Top w0.127: T3.15@30.47,37.834 30.47,38.747 30.853,39.131 30.853,72.462 39.606,81.215 50.84,81.215 51.113,81.488 U3.20@52.176,81.488
ESW_TXVP_D_P1: T3.3 U3.38 | length 47.3
  Top w0.127: T3.3@42.71,37.834 42.71,38.747 43.093,39.13 43.093,41.692 40.157,44.628 40.157,69.977 44.195,74.015 50.84,74.015 51.113,74.288 U3.38@52.176,74.288
ESW_TXVP_D_P2: T2.15 U3.56 | length 46.4
  Top w0.127: U3.56@52.176,67.088 51.113,67.088 50.84,66.815 48.629,66.815 44.221,62.408 44.221,46.838 48.133,42.926 57.604,42.926 59.301,41.229 59.301,39.131 58.918,38.747 T2.15@58.918,37.834
ESW_TXVP_D_P3: T2.3 U3.74 | length 45.8
  Top w0.127: U3.74@52.176,59.888 51.113,59.888 50.84,59.615 50.263,59.615 47.117,56.469 47.117,47.854 49.784,45.187 67.51,45.187 71.541,41.155 71.541,39.13 71.158,38.747 T2.3@71.158,37.834
ESW_TXVP_D_P4: T1.3 U3.92 | length 52.6
  Top w0.127: U3.92@52.176,52.688 51.113,52.688 50.84,52.415 50.151,52.415 49.733,51.997 49.733,48.768 50.8,47.701 83.562,47.701 90.17,41.094 90.17,39.505 89.662,38.997 T1.3@89.662,38.284